# Altium PCB MB2146-07-E.PcbDoc
Units mil, origin at the board's own origin, x right, y up, seen from the top; angles counter-clockwise.
Board outline 3474.57 x 2017.87 mil, 4 copper layers (TOP, POWER, GND, BOTTOM), stack 28.8 mil thick; 122 components, 77 nets, 373 pads, 111 vias.
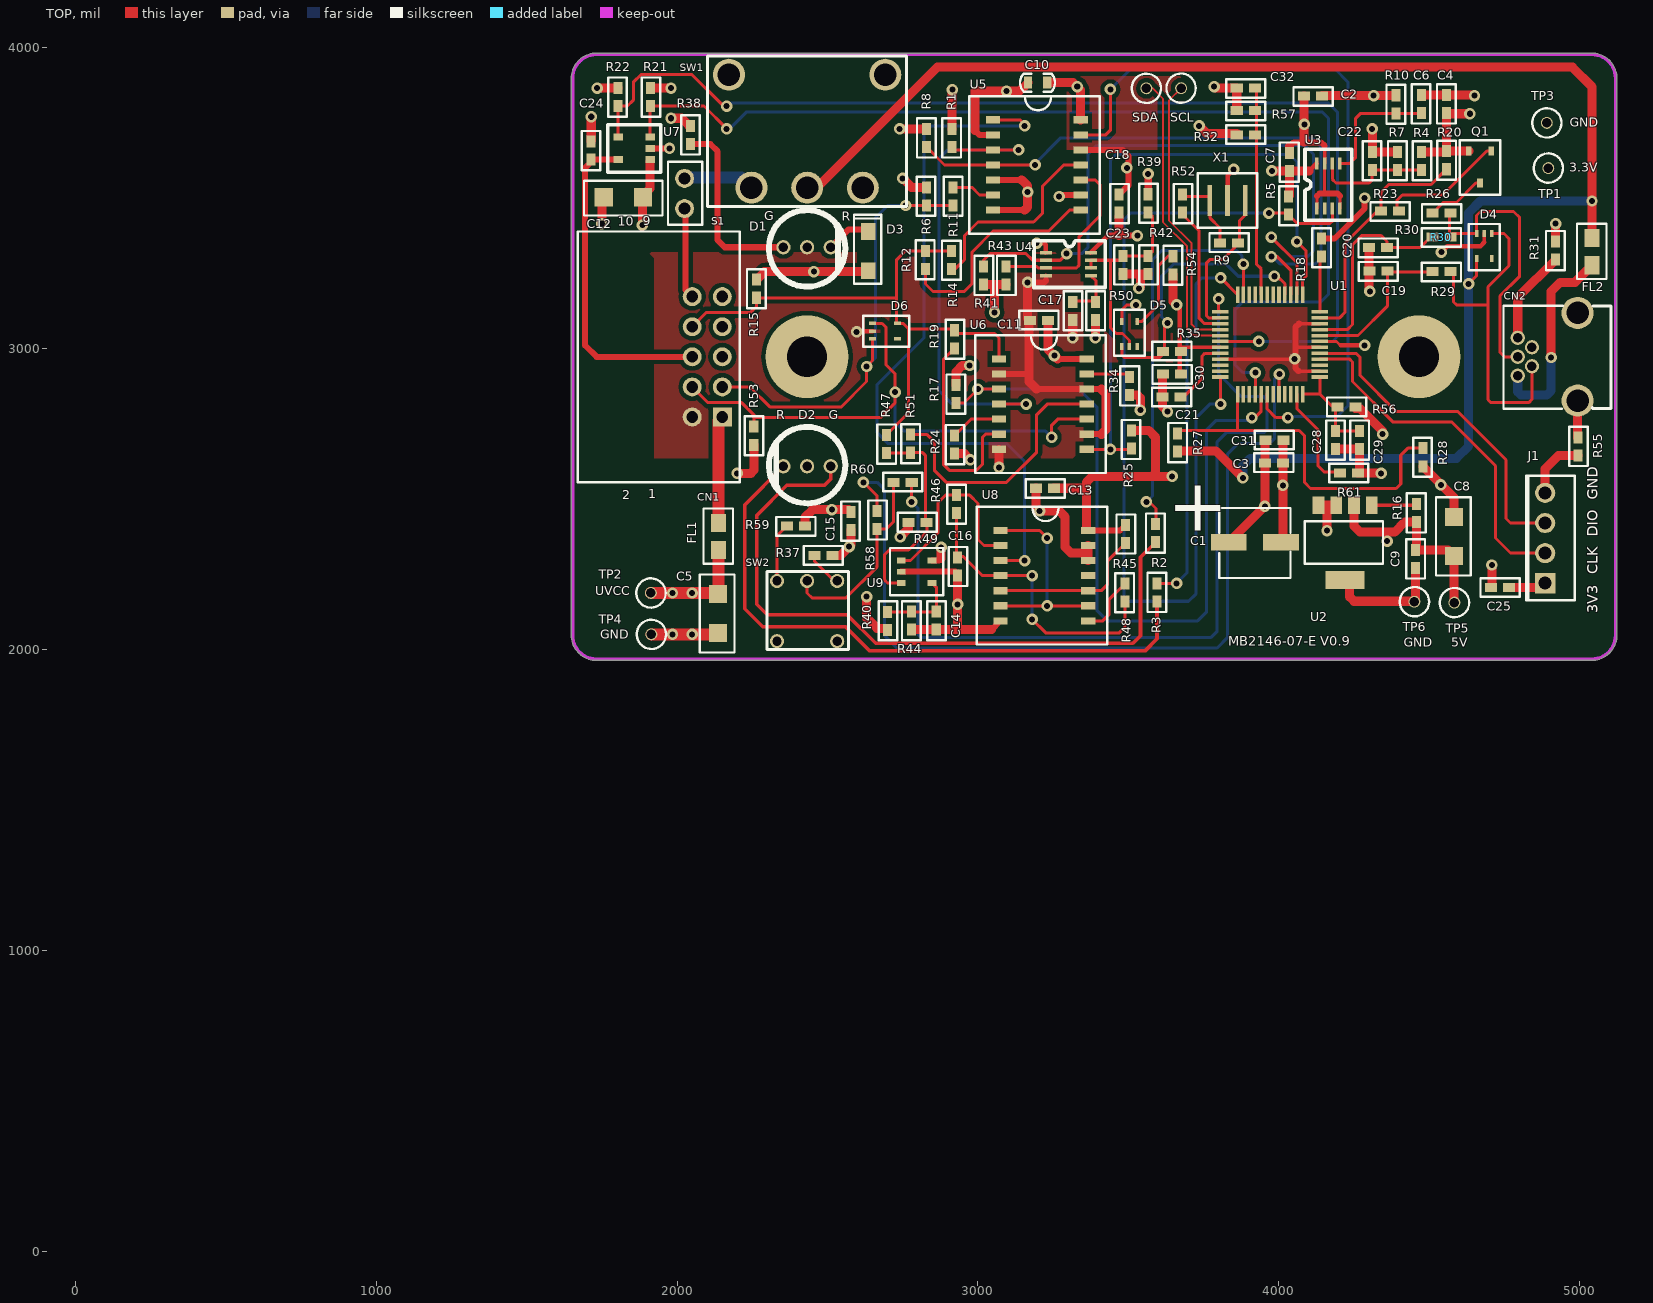
[diagram p0: TOP view]
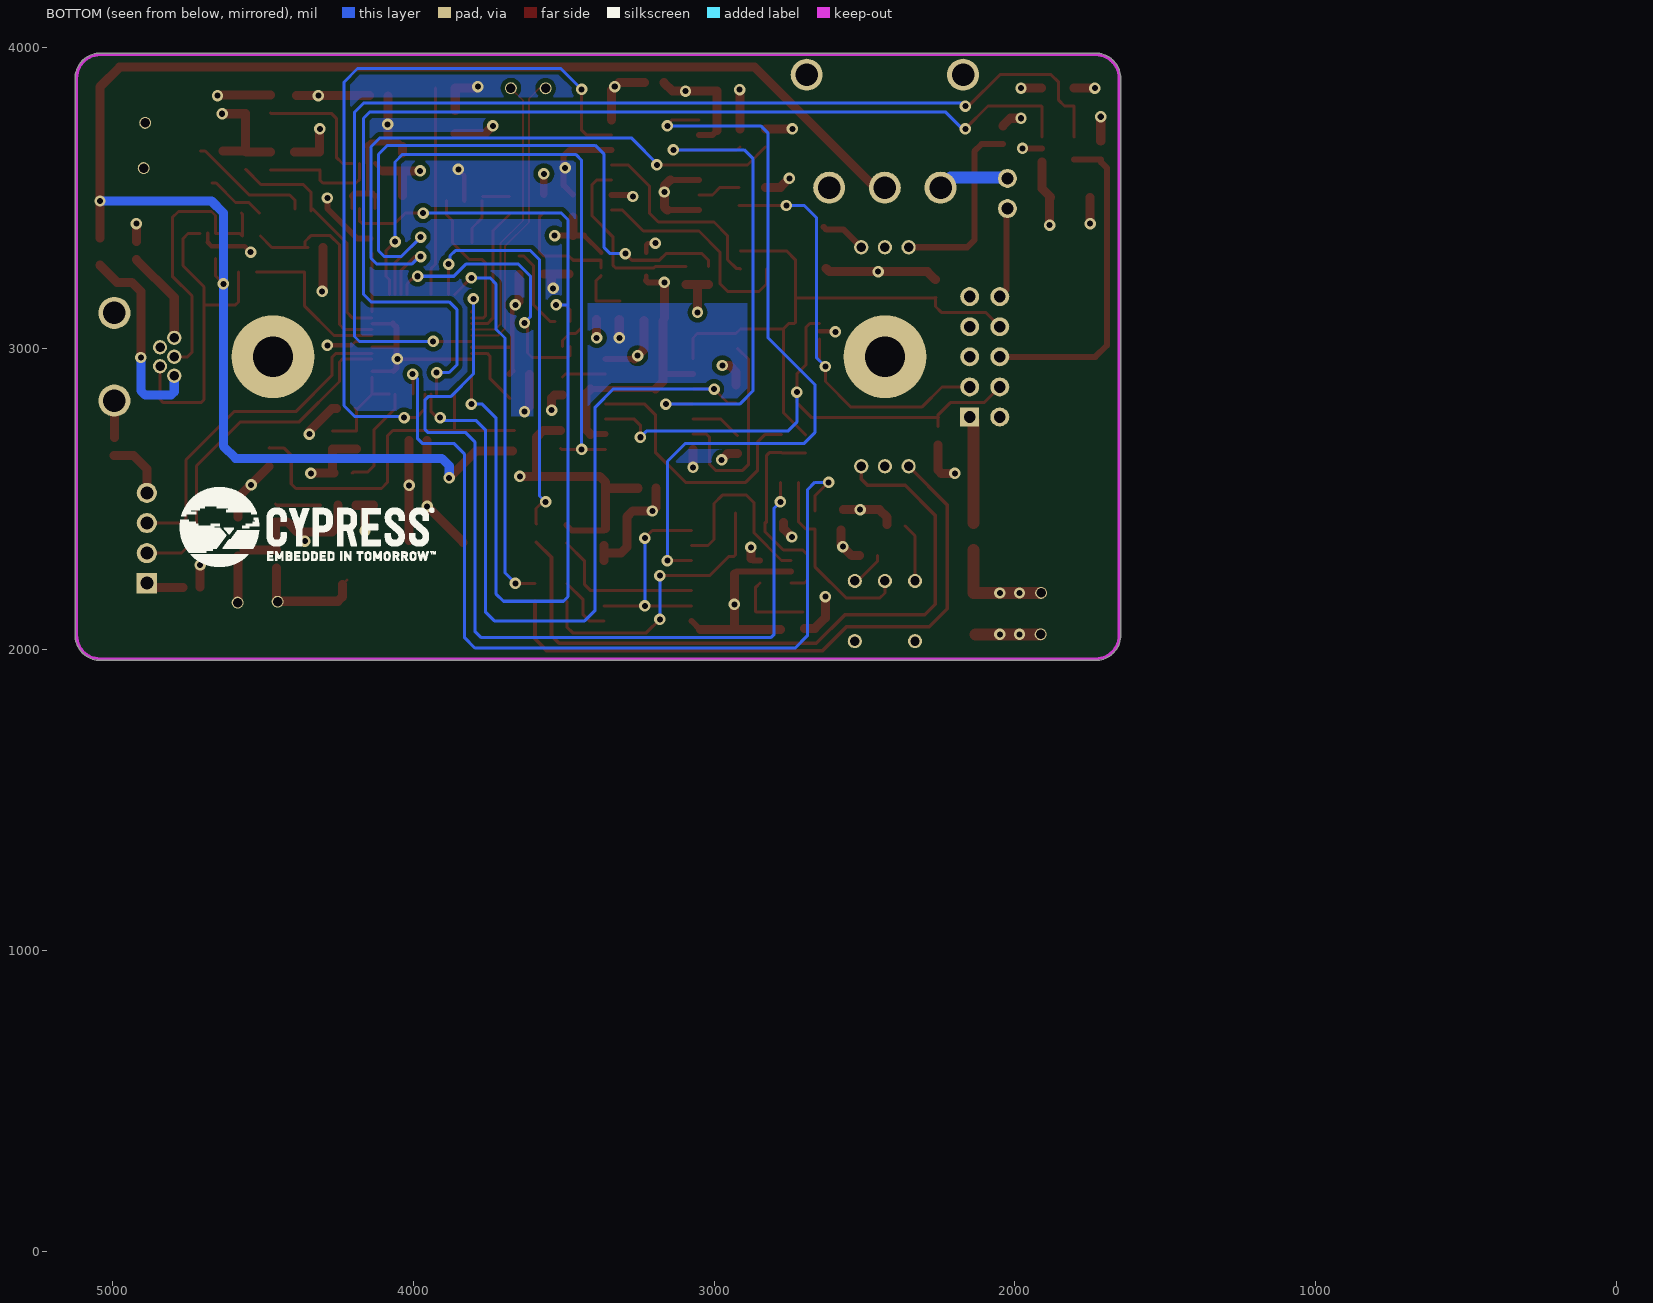
[diagram p1: BOTTOM view, seen from below]
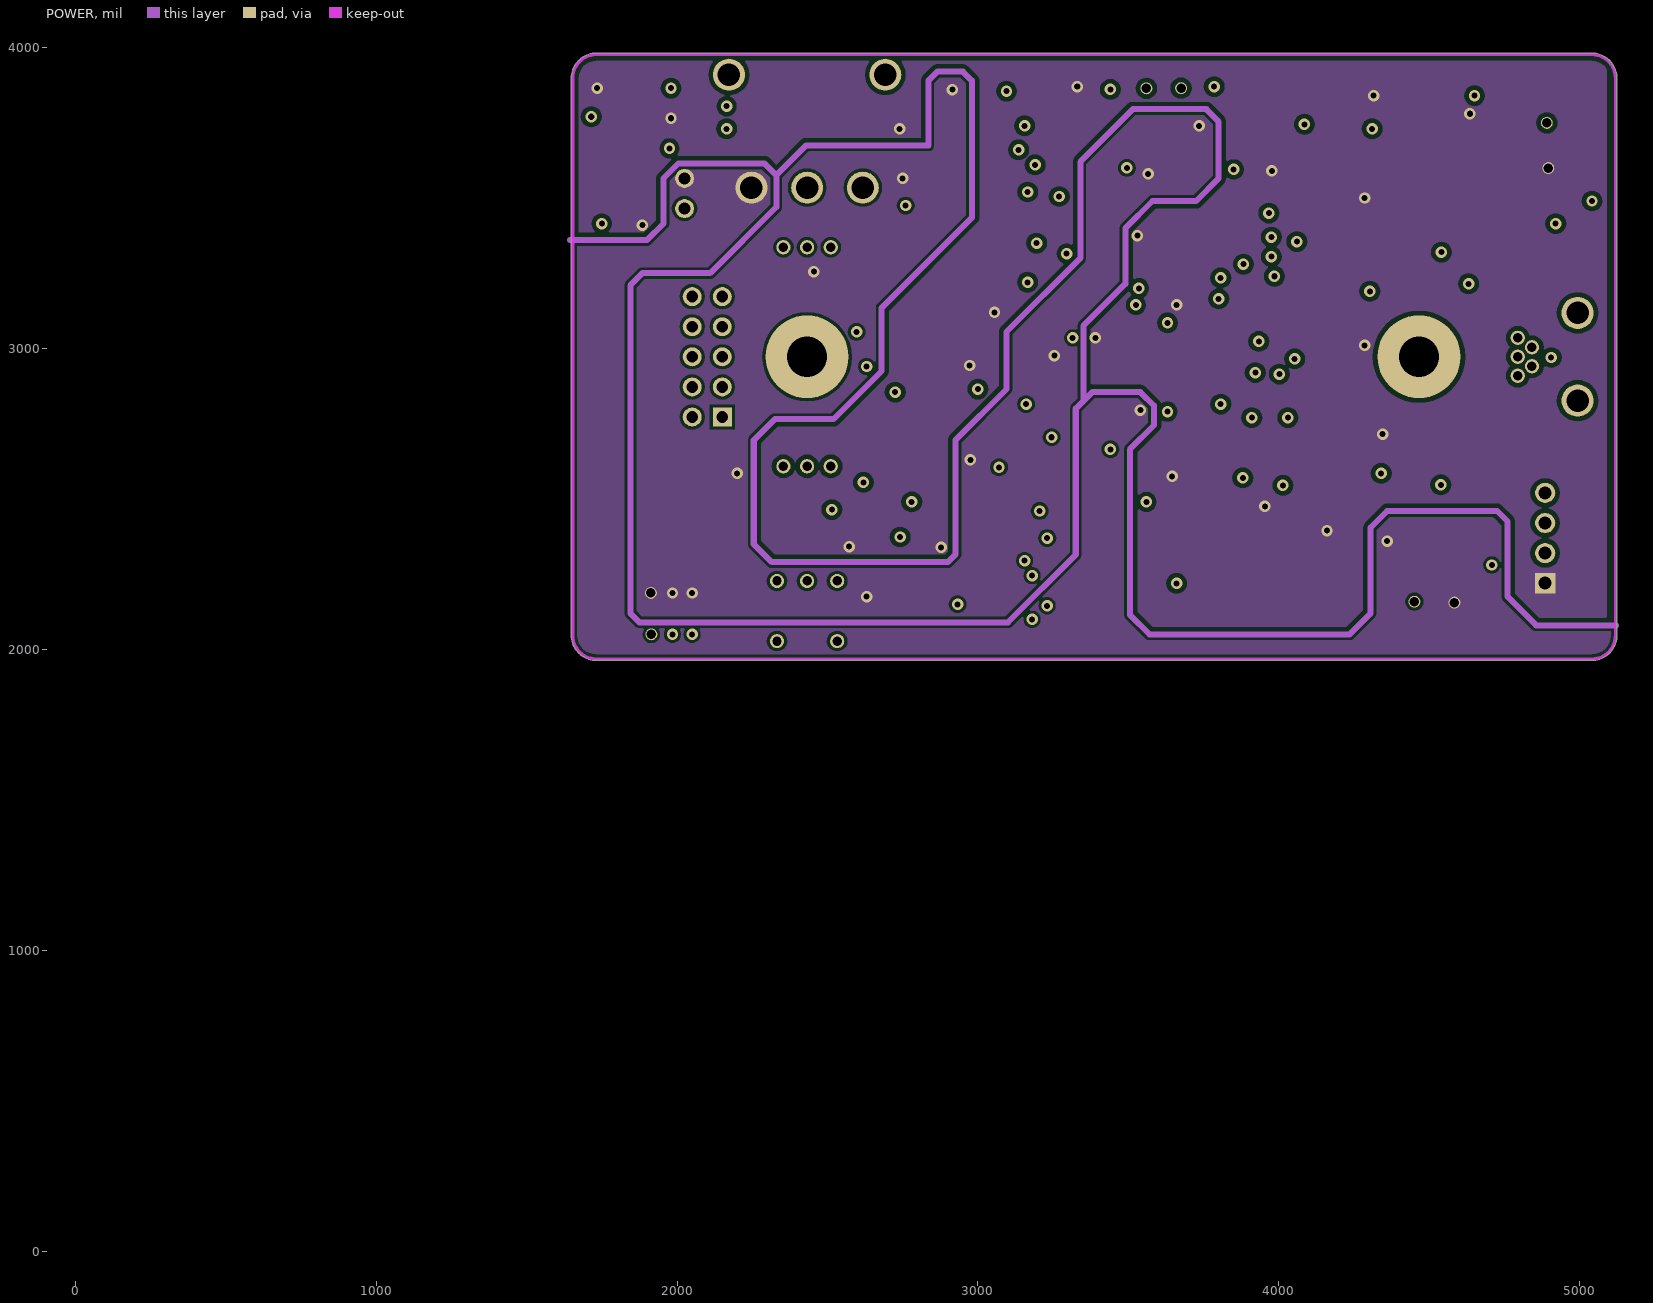
[diagram p2: POWER]
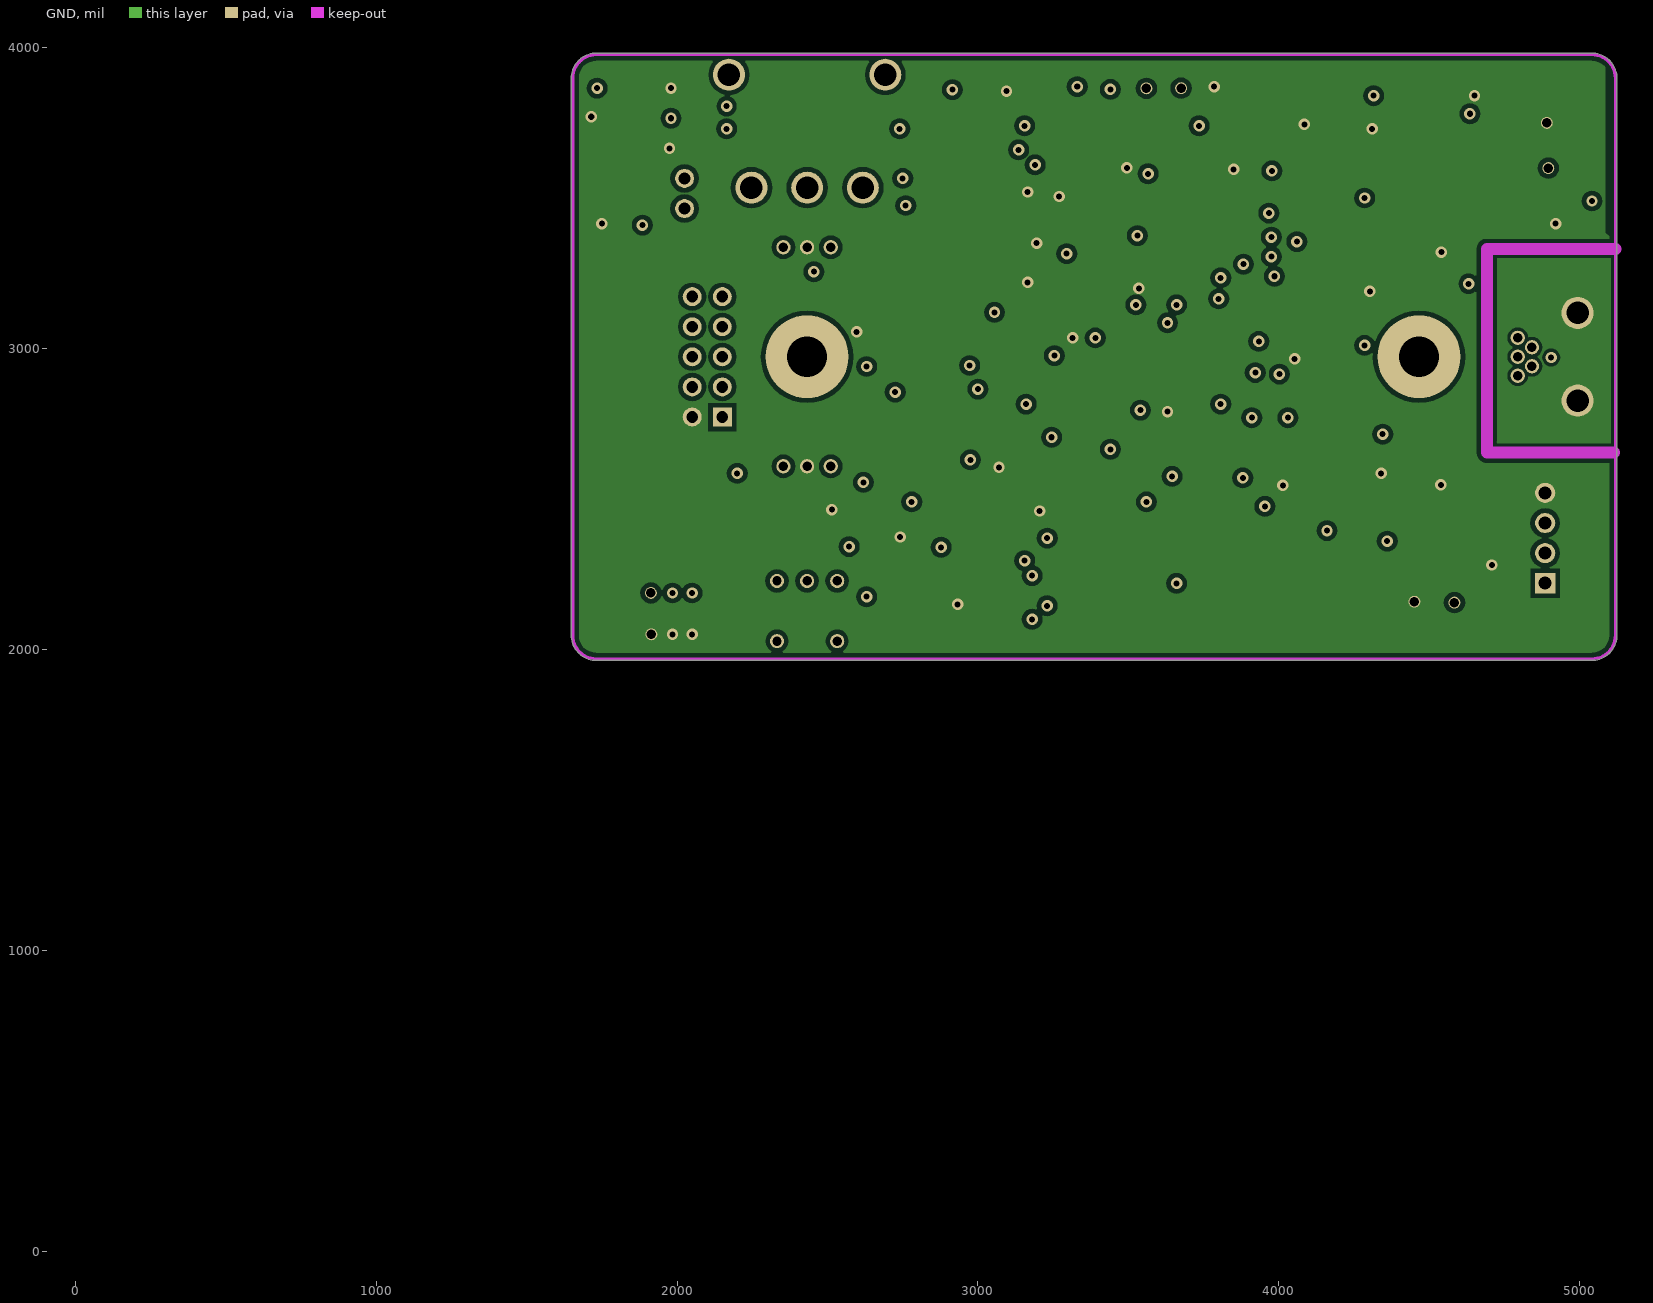
[diagram p3: GND]

## Layer stack, top to bottom
TOP: signal copper 1.2
Dielectric: core 8, FR-4, Dk 4.5
POWER: signal copper 1.2
Dielectric: core 8, FR-4, Dk 4.5
GND: signal copper 1.2
Dielectric: core 8, FR-4, Dk 4.5
BOTTOM: signal copper 1.2

## Board outline
1648.54,2047.24 ccw(c1732.28,2047.24) 1732.28,1963.5 5039.37,1963.5 ccw(c5039.37,2047.24) 5123.11,2047.24 5123.11,3897.63 ccw(c5039.37,3897.63) 5039.37,3981.37 1732.28,3981.37 ccw(c1732.28,3897.63) 1648.54,3897.63

## Design rules (kind name [scope] priority, off if disabled: settings)
Clearance [All] p1: gap=3
HoleSize [All] p1: absolutevalues=TRUE maxlimit=300 minlimit=1 maxpercent=80.000 minpercent=20.000
HoleToHoleClearance [All] p1: gap=3 allowstackedmicrovias=TRUE
MinimumSolderMaskSliver [All] p1: minsoldermaskwidth=0
PlaneConnect [All] p1: planeconnectstyle=Direct reliefexpansion=20 reliefentries=4 reliefconductorwidth=10 reliefairgap=10
PolygonConnect [All] p1: connectstyle=Direct reliefconductorwidth=10 reliefentries=4 polygonreliefangle="90 Angle"
RoutingVias [All] p1: holewidth=28 width=50 viastyle="Through Hole" minholewidth=28 minwidth=50 maxholewidth=28 maxwidth=50
SilkToSilkClearance [All] p1: silktosilkclearance=0
SilkscreenOverComponentPads SilkToSolderMaskClearance [IsPad] p1: minsilkscreentomaskgap=0
SolderMaskExpansion [All] p1: expansion=4
TestPointUsage FabricationTestPointUsage [All] p1: valid=0 allowmultiple=FALSE
Testpoint FabricationTestpoint [All] p1: side=3 testpointundercomponent=TRUE minsize=40 maxsize=100 preferedsize=60 minholesize=0 maxholesize=40 preferedholesize=32 testpointgrid=1 style=297 order=0-112345678
Width [All] p1: maxlimit=50 minlimit=4 preferedwidth=10
18 further rules are at their usual default settings.

## Components (designator, comment, footprint, x,y, rotation, side; value= is the part's Value field where it differs from the comment)
C1 "Cap Pol3" EMVS_E46 3920.5,2355.5 r270 top
C2 "Cap" 0603 4113.5,3838.5 r0 top
C3 "Cap" 0603 3983.5,2619.5 r180 top
C4 "Cap" 0603 4557.5,3812.5 r270 top
C5 "Cap" 1206 2135.5,2119.5 r270 top
C6 "Cap" 0603 4473.5,3812.5 r270 top
C7 "Cap" 0603 4035.5,3619.5 r270 top
C8 "Cap" 1206 4582.5,2375.5 r270 top
C9 "Cap" 0603 4453.5,2300.5 r90 top
C10 "Cap" C0603 3229.5,3883.5 r180 top
C11 "Cap" 0603 3202.5,3093.5 r180 top
C12 "Cap" 1206 1821.5,3502.5 r0 top
C13 "Cap" 0603 3223.5,2535.5 r0 top
C14 "Cap" 0603 2861.5,2095.5 r90 top
C15 "Cap" 0603 2577.5,2426.5 r270 top
C16 "Cap" 0603 2932.5,2275.5 r90 top
C17 "Cap" 0603 3315,3125 r90 top
C18 "Cap" 0603 3469.5,3481.5 r90 top
C19 "Cap" 0603 4330.5,3257.5 r0 top
C20 "Cap" 0603 4329.5,3335.5 r0 top
C21 "Cap" 0603 3643.5,2839.5 r0 top
C22 "Cap" 0603 4310.5,3623.5 r270 top
C23 "Cap" 0603 3482.5,3277.5 r90 top
C24 "Cap" 0603 1713.5,3657.5 r90 top
C25 "0.1uF" 0603 4735,2205 r180 top
C28 "Cap" 0603 4187.5,2695.5 r90 top
C29 "Cap" 0603 4267.5,2695.5 r90 top
C30 "Cap" 0603 3645,2915 r0 top
C31 "Cap" 0603 3985,2695 r180 top
C32 "Cap" 0603 3890,3865 r0 top
CN1 "Header 10H" FAP-10-08 2050.5,3172.25 r270 top
CN2 "VUSB" USB_CN01 4793.78,3035.42 r180 top
D1 "GL3ED8" GL3ED8 2510.98,3336.37 r180 top
D2 "GL3ED8" GL3ED8 2353.5,2608.5 r0 top
D3 "S-183T" S_183T 2635.5,3337.5 r180 top
D4 "NNCD6.2LH" NNCD6_2LH 4682.5,3354.5 r180 top
D5 "NNCD6.2LH" NNCD6_2LH 3503.5,3034.5 r0 top
D6 "NNCD6.2LH" NNCD6_2LH 2677.5,3057.5 r270 top
FL1 "BLM21PG600SN1" 0805 2138.5,2375.5 r90 top
FL2 "BLM21PG600SN1" 0805 5040.5,3321.5 r90 top
J1 "J1" SWD_4_2.54 4880,2370 r90 top
Q1 "RTR030P02" TSMT3_0 4668.5,3620.5 r180 top
R1 "Res1" 0603 2913.5,3699.5 r270 top
R2 "Res1" 0603 3590.5,2386.5 r270 top
R3 "Res1" 0603 3595.5,2189.5 r270 top
R4 "Res1" 0603 4474.5,3623.5 r90 top
R5 "Res1" 0603 4031.5,3474.5 r90 top
R6 "Res1" 0603 2828.5,3505.5 r270 top
R7 "Res1" 0603 4394.5,3623.5 r270 top
R8 "Res1" 0603 2829.5,3699.5 r270 top
R9 "Res1" 0603 3834.5,3350.5 r180 top
R10 "Res1" 0603 4389.5,3811.5 r270 top
R11 "Res1" 0603 2916.5,3505.5 r90 top
R12 "Res1" 0603 2825.5,3294.5 r270 top
R14 "Res1" 0603 2912.5,3293.5 r270 top
R15 "Res1" 0603 2264.5,3198.5 r270 top
R16 "Res1" 0603 4457.5,2453.5 r270 top
R17 "Res1" 0603 2927.5,2848.5 r270 top
R18 "Res1" 0603 4141.01,3335 r90 top
R19 "Res1" 0603 2922.5,3030.5 r90 top
R20 "Res1" 0603 4556.5,3625.5 r90 top
R21 "Res1" 0603 1912.5,3835.5 r90 top
R22 "Res1" 0603 1803.5,3835.5 r270 top
R23 "Res1" 0603 4369.5,3456.5 r0 top
R24 "Res1" 0603 2922.5,2680.5 r90 top
R25 "Res1" 0603 3509.5,2697.5 r270 top
R26 "Res1" 0603 4540.5,3449.5 r0 top
R27 "Res1" 0603 3662.5,2687.5 r90 top
R28 "Res1" 0603 4478.5,2638.5 r270 top
R29 "Res1" 0603 4540,3255 r0 top
R30 "Res1" 0603 4540,3370 r0 top
R31 "Res1" 0603 4919.5,3325.5 r270 top
R32 "Res1" 0603 3890,3710 r180 top
R34 "Res1" 0603 3503.5,2875.5 r90 top
R35 "Res1" 0603 3644.5,2990.5 r180 top
R37 "Res1" 0603 2486.18,2311.67 r180 top
R38 "Res1" 0603 2045.5,3709.5 r270 top
R39 "Res1" 0603 3565.5,3482.5 r90 top
R40 "Res1" 0603 2700,2095 r90 top
R41 "Res1" 0603 3018.5,3242.5 r90 top
R42 "Res1" 0603 3565.5,3277.5 r90 top
R43 "Res1" 0603 3093.5,3242.5 r90 top
R44 "Res1" 0603 2779.5,2095.5 r270 top
R45 "Res1" 0603 3490.5,2383.5 r90 top
R46 "Res1" 0603 2928.5,2482.5 r90 top
R47 "Res1" 0603 2695.5,2682.5 r90 top
R48 "Res1" 0603 3488.5,2188.5 r270 top
R49 "Res1" 0603 2798.5,2421.5 r180 top
R50 "Res1" 0603 3390,3125 r90 top
R51 "Res1" 0603 2775.5,2683.5 r90 top
R52 "Res1" 0603 3680.5,3481.5 r90 top
R53 "Res1" 0603 2255,2710 r90 top
R54 "Res1" 0603 3648.5,3276.5 r270 top
R55 "Res1" 0603 4994.5,2674.5 r90 top
R56 "Res1" 0603 4225,2805 r180 top
R57 "Res1" 0603 3890,3790 r0 top
R58 "Res1" 0603 2665,2430 r90 top
R59 "Res1" 0603 2395,2410 r0 top
R60 "Res1" 0603 2750,2555 r180 top
R61 "Res1" 0603 4232.5,2585.5 r180 top
S1 "NC" FFC_2 2025,3565 r270 top
SCL "SCL" TP_8G 3675,3865 r0 top (schematic designator FP2)
SDA "SDA" TP_8G 3559.75,3864.44 r0 top (schematic designator FP3)
SW1 "5MS1S102AM6QES" 5MS1S102AM6QES 2432.5,3534.5 r180 top
SW2 "8US8R2A1M6RE" M6RE 2432.24,2227.5 r0 top
TP1 "3.3V" TP_8G 4895.5,3599.5 r0 top
TP2 "UVCC" TP_8G 1913.5,2187.5 r0 top
TP3 "GND" TP_8G 4890.5,3749.5 r0 top
TP4 "GND" TP_8G 1915,2050 r0 top
TP5 "5.0V" TP_8G 4583.5,2155.5 r0 top
TP6 "GND" TP_8G 4450.5,2158.5 r0 top
U1 "S6E1C32C0AGV20000" LQFP48 4079.14,3178.79 r180 top
U2 "LP3964EMP-3.3" SOT223_5 4220,2355 r180 top
U3 "RNA52A10MMEL" SOP8 4205,3505 r0 top
U4 "RNA52A10MMEL" SOP8 3265,3240 r270 top
U5 "RD74LVC125BPFEL" SOP14 3050,3760 r270 top
U6 "RD74LVC125BPFEL" SOP14 3070,2965 r270 top
U7 "MAX4789EUK+" SOT23_5L 1840,3665 r270 top
U8 "RD74LVC00BFPEL" SOP14 3075,2395 r270 top
U9 "LMV7219M5" SOT23_5 2810,2270 r90 top
X1 "CSTCR8M00G53-R0" CSTCR 3888.5,3491.5 r0 top
? "Comment" logo 4380.37,2387.99 r180 bottom

## Footprints (in the part's own frame and the unit in brackets; to place one, negate y for a bottom-side part, rotate by r counter-clockwise, add the part's x,y. Pads: shape width x height; smd on the part's side, far side on the other; paste and mask are expansions set on the pad)
5MS1S102AM6QES [mm] "5MS1S102AM6QES"
  round 2.7 hole 1.9: 1(4.7,0) 2(0,0) 3(-4.7,0) 4(-6.6,-9.53) 5(6.6,-9.53)
  silkscreen extent -8.4,-11.1 8.4,1.6, body extent -7.9,-10.8 8.1,1.2, height 3.81
0603 [mil] "0603"
  rect 40x30 smd: 1(-30,0) 2(30,0)
  silkscreen extent -65,-32 65,30, body extent -55,-23 56,21, height 150
0805 [mil] "0805"
  rect 60x50 smd: 1(-45,0) 2(45,0)
  silkscreen extent -91,-48 93,50, body extent -80,-30 80,30, height 150
1206 [mil] "1206"
  rect 60x60 smd: 1(-65,0) 2(65,0)
  silkscreen extent -130,-60 130,55, body extent -110,-40 105,40, height 150
C0603 [mm]
  rect 0.7x1 smd: 1(-0.025,0) 2(1.6,0)
  silkscreen extent -0.68,-0.76 2.28,0.76
CSTCR [mm] "CSTCR"
  rect 0.399x2.601 smd: 1(0,0) 2(-1.5,0) 3(-3,0)
  silkscreen extent -4,-2.3 1,2.3
EMVS_E46 [mil] "EMVS_E46"
  rect 55.1x118.1 smd: 1(0,-86.61) 2(0,86.61)
  silkscreen extent -114,-118 118,118, body extent -102,-102 102,102, height 150
FAP-10-08 [mm] "FAP-10-08"
  rect 1.6x1.6 hole 1: 1(10.16,2.54)
  round 1.6 hole 1: 2(10.16,0) 3(7.62,2.54) 4(7.62,0) 5(5.08,2.54) 6(5.08,0) 7(2.54,2.54) 8(2.54,0) 9(0,2.54) 10(0,0)
  silkscreen extent -5.5,-9.66 15.66,4, body extent -5.1,-9.4 15.4,3.8, height 3.81
FFC_2 [mm] "FFC_2"
  round 1.6 hole 1: 1(0,0) 2(2.54,0)
  silkscreen extent -1.4,-1.4 3.9,1.5, body extent -1,-0.9 3.5,0.8, height 3.81
GL3ED8 [mil] "GL3ED8"
  round 47.2 hole 31.5: 1(0,0) 2(78.74,0) 3(157.48,0)
  silkscreen extent -48,-123 206,131, body extent -58,-133 216,141, height 150
logo [mil]
  silkscreen extent -395,-114 456,150
LQFP48 [mm] "LQFP48"
  rect 0.3x1.4 smd: 1(0,0) 2(0.5,0) 3(1,0) 4(1.5,0) 5(2,0) 6(2.5,0) 7(3,0) 8(3.5,0) 9(4,0) 10(4.5,0) 11(5,0) 12(5.5,0) 25(5.5,8.4) 26(5,8.4) 27(4.5,8.4) 28(4,8.4) 29(3.5,8.4) 30(3,8.4) 31(2.5,8.4) 32(2,8.4) 33(1.5,8.4) 34(1,8.4) 35(0.5,8.4) 36(0,8.4)
  rect 1.4x0.3 smd: 13(6.95,1.45) 14(6.95,1.95) 15(6.95,2.45) 16(6.95,2.95) 17(6.95,3.45) 18(6.95,3.95) 19(6.95,4.45) 20(6.95,4.95) 21(6.95,5.45) 22(6.95,5.95) 23(6.95,6.45) 24(6.95,6.95) 37(-1.45,6.95) 38(-1.45,6.45) 39(-1.45,5.95) 40(-1.45,5.45) 41(-1.45,4.95) 42(-1.45,4.45) 43(-1.45,3.95) 44(-1.45,3.45) 45(-1.45,2.95) 46(-1.45,2.45) 47(-1.45,1.95) 48(-1.45,1.45)
  body extent -2.3,-0.9 7.8,9.3, height 3.81
M6RE [mil] "M6RE"
  round 47.2 hole 31.5: 1(-100,0) 2(0,0) 3(100,0) 4(100,-200) 5(-100,-200)
  silkscreen extent -134,-228 138,32
NNCD6_2LH [mm] "NNCD6_2LH"
  rect 0.3x0.599 smd: 1(-0.65,-0.7) 2(0,-0.7) 3(0.65,-0.7) 4(0.65,1.4) 5(-0.65,1.4)
  silkscreen extent -1.3,-1.5 1.3,2.4, body extent -1,-1.2 1,2, height 3.81
S_183T [mm] "S_183T"
  rect 1.199x1.4 smd: 1(0,-1.3) 2(0,2)
  silkscreen extent -1.1,-2.7 1.2,3.1, body extent -1.2,-2.8 1.3,3.2, height 3.81
SOP8 [mm] "SOP8"
  rect 0.3x1.001 smd: 1(-2,-1) 2(-1.35,-1) 3(-0.7,-1) 4(-0.05,-1) 5(-0.05,2.8) 6(-0.7,2.8) 7(-1.35,2.8) 8(-2,2.8)
  silkscreen extent -3,-2 0.95,4
SOP14 [mil] "SOP14"
  rect 23.6x47.2 smd: 1(0,0) 2(50,0) 3(100,0) 4(150,0) 5(200,0) 6(250,0) 7(300,0) 8(300,291.34) 9(250,291.34) 10(200,291.34) 11(150,291.34) 12(100,291.34) 13(50,291.34) 14(0,291.34)
  silkscreen extent -79,-79 379,354, body extent -35,-43 343,331, height 150
SOT23_5 [mil] "SOT23_5"
  rect 18.7x29.5 smd: 1(25.59,64.96) 2(-11.81,64.96) 3(-49.21,64.96) 4(-49.21,-37.4) 5(25.59,-37.4)
  silkscreen extent -91,-75 67,102, body extent -71,-59 47,91, height 150
SOT23_5L [mil] "SOT23_5L"
  rect 23.6x31.5 smd: 1(37.4,70.87) 2(0,70.87) 3(-37.4,70.87) 4(-37.4,-35.43) 5(37.4,-35.43)
  silkscreen extent -79,-71 79,106, body extent -59,-59 59,94, height 150
SOT223_5 [mm] "SOT223_5"
  rect 1x1.5 smd: 1(-2.25,-3.15) 2(-0.75,-3.15) 3(0.75,-3.15) 4(2.25,-3.15)
  rect 3.299x1.501 smd: 5(0,3.15)
  silkscreen extent -3.2,-1.8 3.4,1.8, body extent -3.6,-4.3 3.7,4.4, height 3.81
SWD_4_2.54 [mm]
  rect 1.7x1.7 hole 1.1: 1(-3.81,-0.127)
  round 1.7 hole 1.1: 2(-1.27,-0.127) 3(1.27,-0.127) 4(3.81,-0.127)
  silkscreen extent -5.25,-2.63 5.25,1.58
TP_8G [mil] "TP_8G"
  round 39.4 hole 31.5: 1(0,0)
  silkscreen extent -49,-49 49,49
TSMT3_0 [mil] "TSMT3_0"
  rect 18.7x29.5 smd: 1(-37.4,-35.43) 2(37.4,-35.43) 3(0,70.87)
  silkscreen extent -67,-71 67,110, body extent -51,-55 51,94, height 150
USB_CN01 [mil] "USB_CN01"
  round 47.2 hole 31.5: 1(0,125.98) 2(-47.24,94.49) 3(0,62.99) 4(-47.24,31.5) 5(0,0)
  round 106.3 hole 74.8: SHELL1(-198.82,208.66) SHELL2(-198.82,-82.68)
  silkscreen extent -310,-106 47,236, body extent -280,-90 30,220, height 150

## Part data
C25: library part "C_no pol", "Capacitor without polarity"
C28 C29 C30 C31 C32: "Capacitor"
J1: library part "Header 4", "Header, 4-Pin"
R18 R32 R56 R57 R58 R59 R60 R61: "Resistor"
SCL SDA: library part TP

## Free pads (board coordinates)
  round 275.59 hole 133.86: 1(2432.24,2972.44) 1(4465.59,2972.44)

## Via types
v1: diameter 38, hole 20, TOP to BOTTOM, 111 vias

## Nets (pads, with @x,y where several pads share a name; then routed paths per layer and width w, separated by ;. In a path a pad name is that pad's centre, name@x,y a point inside that pad or via, vN(x,y) a via of type N, cw(c..) or ccw(c..) an arc to the next point about the centre after c; other vN are vias at no path point)
3.3V: C1.1 C2.2 C3.2 C4.2 C7.2 C10.1 C12.2 C13.2 C15.2 C18.1 C25.1 C30.2 C31.2 J1.1 Q1.2 R4.2 R5.2 R8.1 R10.1 R17.1 R18.2 R20.2 R22.1 R25.1 R35.1 R37.1 R38.1 R41.1 R43.1 R45.2 R50.1 R54.2 R56.1 TP1.1 U1.19 U1.43 U2.3 U2.4 U3.8 U4.8 U5.14 U7.1 U8.14 U9.5 | length 4849.7
  TOP w10: v1(1734.44,3865) v1@1734.94,3865.5 ; C12.2@1881.5,3502.5 C12.2@1885,3499 ; R8.1@2829,3730 R8.1 ; U8.14@3360,2401.34 U8.14 ; R50.1@3390,3097 R50.1@3391.5,3098.5 ; C31.2@3953.5,2693.5 C31.2 ; R5.2 R5.2@4035.5,3508.5 ; C7.2@4035,3590 C7.2 ; U1.43 4191.72,3023.28 4205,3010 ; C2.2 C2.2@4145,3840 ; v1(4345,2715) v1@4345,2725 ; R10.1@4388,3840 R10.1 ; R20.2@4554.5,3653.5 R20.2 R20.2@4556.93,3655.93 ; C4.2@4556.5,3781.5 C4.2 C4.2@4560,3780
  TOP w12: R35.1@3670,3003.59 U1.19
  TOP w15: U4.8 3431.5,3375 ; v1@3648.5,3156.5 v1(3660,3145) 3670,3135 C30.2@3670,2925 ; 4100.52,3589.5 U3.8 ; 4205,3010 v1(4285,3010)
  TOP w20: U9.5 2847.99,2295 2870,2295 ; U8.14 3472,2395 R45.2 ; 3431.5,3375 3480,3375 v1(3530,3375) ; C30.2@3670,2925 C30.2@3680,2915 ; R18.2 4185,3365 4285,3465 v1(4285,3500)
  TOP w30: v1@1734.94,3865.5 R22.1 ; C12.2@1881.5,3502.5 1910.87,3531.87 U7.1@1910.87,3620 ; v1(1885,3410) C12.2@1885,3499 ; v1(1980,3765) 2015,3765 R38.1@2040.5,3739.5 ; R37.1 2541.67,2311.67 2565,2335 2577.5,2347.5 C15.2 ; v1(2740,3730) R8.1@2829,3730 ; 2877.6,2302.6 v1(2877.6,2339.41) ; R17.1 2927.5,2922.5 2948.5,2943.5 v1(2972.5,2943.5) ; R41.1 3055,3212.5 ; v1(3055,3120) 3055,3212.5 ; R43.1 3055,3212.5 ; C10.1 3316.5,3883.5 3341.34,3858.66 U5.14 ; C13.2 3360,2535.5 ; U8.14@3360,2401.34 3360,2535.5 ; v1(3390,3035) R50.1@3390,3097 ; 3469.5,3375 C18.1@3469.5,3436.5 ; R25.1 3567.5,2727.5 3590,2705 3590,2585 3580,2575 ; v1(3645,2575) 3580,2575 ; v1@3648.5,3156.5 R54.2 ; C1.1 v1(3953.5,2475.11) C3.2 C31.2@3953.5,2693.5 ; v1@3975,3590 C7.2@4035,3590 ; R5.2@4035.5,3508.5 C7.2 4100.52,3589.5 ; U2.4 4160,2479.02 ; C2.2@4145,3840 v1(4315,3840) R10.1@4388,3840 ; v1(4160,2395) 4160,2479.02 ; U2.3 4160,2479.02 ; R56.1@4255,2800 4270,2800 v1@4345,2725 ; R4.2 R20.2@4554.5,3653.5 ; R20.2 4556.5,3725 C4.2@4556.5,3781.5 ; R20.2@4556.93,3655.93 Q1.2 ; C4.2@4560,3780 v1(4635,3780) ; C25.1 4870,2205 J1.1 ; 3360,2535.5 3360,2555 3380,2575 3580,2575
  other v1: 2571.79,2341.79 3976.66,3590 3330,3870
5.0V: C8.2 C9.2 R16.2 R34.1 S1.1 SW1.1 TP5.1 U2.2 | length 997.2
  TOP w10: C9.2 C9.2@4457.5,2334.5 ; C8.2@4562.5,2330.5 C8.2 ; TP5.1@4582.5,2166.5 TP5.1@4588.5,2160.5
  TOP w30: R34.1 3529.5,2845.5 3540,2835 v1(3540,2795) ; U2.2 4249.53,2410.47 4270,2390 4385,2390 4418.5,2423.5 R16.2 C9.2@4457.5,2334.5 ; C9.2 C8.2@4562.5,2330.5 ; TP5.1@4582.5,2166.5 C8.2
  BOTTOM w40: S1.1@2028.5,3568.5 2213.46,3568.5 SW1.1
  other v1: 4360,2360
CCM_SELECT: R27.2 R28.1 U1.25 | length 1220.7
  TOP w10: R27.2@3662.5,2727.5 3837.5,2727.5 4067.5,2727.5 4085,2710 4085,2555 4105,2535 4390,2535 4405,2550 4405,2645 4428.5,2668.5 R28.1 R28.1@4476.66,2670.34 ; 3862.6,2727.5 U1.25
"ECO IN": R52.1 U1.15 | length 445.6
  TOP w10: R52.1@3680,3445 3735,3390 3735,3100 3752.67,3082.33 U1.15
"ECO OUT": R9.1 U1.14 X1.1 | length 509.9
  TOP w10: U1.14 3765.97,3102.02 3760,3107.98 3760,3285 3770,3295 3813,3295 3868.5,3350.5 3868.5,3423.5 3888.5,3443.5 X1.1
FGND: CN2.SHELL1 CN2.SHELL2 R55.2 | length 122.3
  TOP w30: R55.2@4992.6,2704.5 CN2.SHELL1
GND: C1.2 C2.1 C3.1 C4.1 C5.2 C6.1 C7.1 C8.1 C9.1 C10.2 C11.2 C12.1 C13.1 C14.1 C15.1 C16.1 C17.1 C18.2 C19.1 C20.1 C21.1 C22.1 C23.1 C24.2 C25.2 C28.1 C29.1 C30.1 C31.1 C32.1 CN1.2 D1.2 D2.2 D4.2 D6.2 J1.4 R7.1 R21.2 R28.2 R31.1 R42.1 R44.2 R49.2 R55.1 R57.1 R59.2 R61.1 TP3.1 TP4.1 TP6.1 U1.21 U1.38 U1.42 U1.46 U2.5 U3.1 U3.4 U3.7 U4.1 U4.4 U5.2 U5.5 U5.7 U5.9 U5.12 U6.2 U6.7 U6.9 U6.12 U7.2 U8.7 U8.12 U8.13 U9.2 X1.2 | length 8175.3
  TOP w10: C24.2 C24.2@1715,3689 ; C12.1@1750,3501 C12.1@1751.5,3502.5 ; TP4.1 TP4.1@1919.5,2054.5 ; v1@1979.5,3865.5 v1(1980,3865) ; C5.2@2125,2065 C5.2 C5.2@2131,2050 ; C15.1@2569.54,2464.46 C15.1 ; v1(2596.66,3055) v1@2599.16,3057.5 ; C16.1@2924.81,2258.19 C16.1@2932.5,2250.5 ; 2932.5,2068 2935,2065.5 ; C11.2@3165,3101 C11.2 C11.2@3170,3091 ; C17.1@3312.5,3098.5 C17.1@3315,3096 ; C1.2 C1.2@4013.5,2361.89 ; C31.1@4013.5,2693.5 C31.1 ; v1@4054.22,2964.22 v1@4055,2965 ; 4055,3000 4058.59,3003.59 ; 4083.5,3686.5 4085,3685 ; U3.1 4126.26,3506.26 ; 4151.85,3515 U3.7 ; U3.4 4203.03,3506.97 ; U2.5 U2.5@4235,2215.98 ; R61.1 R61.1@4267.5,2590.5 ; v1(4310,3730) v1@4310.5,3729.5 ; v1@4339.5,2585.5 v1(4340,2585) ; TP6.1@4449,2160 TP6.1 TP6.1@4453.5,2161.5 ; v1@4647.5,3842.5 v1(4650,3840) ; C25.2 C25.2@4707.5,2207.5 ; v1@4919.5,3414.5 v1(4920,3415)
  TOP w12: U1.21 v1@4054.22,2964.22 ; 4058.59,3003.59 U1.42 ; 4065.15,2924.85 U1.38@4136.23,2924.85 ; 4067.33,3082.33 U1.46 ; U3.7 4151.85,3673.15 ; 4682.5,3352.5 D4.2
  TOP w15: v1@2599.16,3057.5 D6.2 ; v1(3195,3350) 3220,3350 3225.63,3344.37 U4.1 ; 3225.63,3225.63 U4.4 ; X1.2@3830,3491.5 3830,3575 v1(3850,3595) ; v1(4540,3320) 4560,3340 4670,3340 4682.5,3352.5
  TOP w20: U7.2 v1(1975,3665) ; U9.2 C16.1@2924.81,2258.19 ; 2990,3725 3005,3710 U5.2 ; 3045.5,2065.5 U8.7 ; U5.7 3155,3460 ; U5.5 3145,3560 ; U6.2 3170,2915 ; v1(3165,3220) 3220,3220 3225.63,3225.63 ; 3195,2865 U6.12 3410,2865 ; v1@3270,3510 U5.9 ; U5.12 3480,3660 3500,3640 3500,3542 C18.2 ; U6.9 3410,2715 ; 4035.5,3670.5 4050,3685 4085,3685 4140,3685 4151.85,3673.15 ; 4065.15,2924.85 4055,2935 4055,2965 4055,3000 4055,3070 4067.33,3082.33 ; 4126.26,3506.26 4135,3515 4160,3515 4195,3515 4203.03,3506.97
  TOP w30: C24.2@1715,3689 v1(1715,3770) ; v1(1750,3415) C12.1@1750,3501 ; R21.2 v1@1979.5,3865.5 ; R59.2@2425,2415 2425,2439 2450.46,2464.46 C15.1@2569.54,2464.46 ; v1(2741.5,2373.5) 2768.5,2400.5 R49.2 ; R44.2 C14.1 2935,2065.5 3045.5,2065.5 ; 2932.5,2068 C16.1@2932.5,2250.5 ; 2990,3725 2990,3855 3138.01,3855 C10.2 ; v1(3070,2605) U6.7 ; 3145,3560 3165,3540 3165,3470 3155,3460 ; C11.2@3165,3101 v1(3165,3220) ; C11.2@3170,3091 3170,2915 3170,2890 3195,2865 ; C13.1 3193.5,2471.5 v1(3205,2460) 3270,2460 3290,2440 3290,2340 3310,2320 3366.34,2320 ; v1(3315,3035) C17.1@3315,3096 ; U8.12 U8.13 ; 3410,2715 3425,2730 3425,2850 3410,2865 ; C23.1 3540,3247.5 ; v1(3535,3200) 3540,3205 3540,3247.5 ; R42.1 3540,3247.5 ; C30.1@3613.5,2913.5 3613.5,2806.5 v1(3630,2790) ; v1(3785,3870) 3790,3865 C32.1 R57.1 ; C1.2@4013.5,2361.89 C3.1 C31.1@4013.5,2693.5 ; C7.1 4035.5,3670.5 ; 4083.5,3686.5 C2.1 ; C28.1 C29.1 R61.1@4267.5,2590.5 ; U2.5@4235,2215.98 4235,2175 4250,2160 TP6.1@4449,2160 ; R61.1 v1@4339.5,2585.5 ; v1@4299.5,3190 C20.1 ; v1@4310.5,3729.5 C22.1 R7.1 ; TP6.1@4453.5,2161.5 C9.1 ; C6.1 4515,3842.5 C4.1 v1@4647.5,3842.5 ; R28.2 4582.5,2504.5 C8.1 ; C25.2@4707.5,2207.5 v1(4707.5,2280.5) ; J1.4 4885,2600 4929.5,2644.5 R55.1 ; TP3.1@4890,3750 TP3.1 ; R31.1 v1@4919.5,3414.5
  TOP w40: TP4.1 C5.2@2131,2050
  other v1: 1985,2050 2050,2050 2932.5,2150 2514.5,2464.46 4013.5,2545 4538.05,2546.95 4052.5,2965.5 4302.16,3190 3270,3505 3165,3520 3495,3600 4085,3745 3095,3855
INITX: D5.5 R5.1 U1.24 U3.3 | length 3176.3
  TOP w10: D5.5 3477.91,3127.91 3495,3145 v1(3525,3145) ; v1@3805,2815 3805.52,2815.52 U1.24 ; v1@3970,3450 4026,3450 R5.1 4061,3415 4170,3415 4177.44,3422.44 U3.3
  BOTTOM w10: v1(3525,3145) 3485,3145 ; v1(3806.66,2815) 3770,2815 3725,2770 3725,2185 3700,2160 3500,2160 3485,2175 3485,3145 ; v1(3966.66,3450) 3507.64,3450 3485,3427.36 3485,3145
NetC6_2: C6.2 R10.2 U3.5 | length 416.1
  TOP w10: U3.5 4203.27,3615 4235,3615 4255,3635 4255,3765 4270,3780 4388,3780 R10.2 4472.5,3781.5 C6.2
NetC14_2: C14.2 R40.2 R44.1 U9.4 | length 258.5
  TOP w10: R40.2@2704.5,2124.5 2860.5,2124.5 C14.2 2861.5,2206.69 U9.4
NetC16_2: C16.2 R46.1 R48.2 U8.4 | length 1000.2
  TOP w10: R46.1 2928.5,2314.5 2932.5,2310.5 2935,2308 2952,2308 3015,2245 U8.4 v1(3180,2245) v1@3185,2245 ; v1(3180,2100) 3225,2055 3470,2055 3488.5,2073.5 R48.2
  BOTTOM w10: v1@3175,2090 3180,2095 v1(3180,2245)
NetC17_2: C17.2 R50.2 U4.5 | length 169.2
  TOP w10: C17.2@3312.5,3158.5 3391.5,3158.5 3391.5,3225.71 U4.5
NetC21_2: C21.2 U1.20 | length 232.3
  TOP w10: C21.2@3678.5,2834.5 3745,2901 3745,2975 3753.91,2983.91 U1.20
NetC22_2: C22.2 R4.1 R7.2 U3.6 | length 392.3
  TOP w10: U3.6 4177.44,3562.56 4190,3550 4300,3550 4310,3560 4310,3593 C22.2 R7.2 R4.1
NetC23_2: C23.2 D5.2 R39.1 R42.2 U4.6 U4.7 | length 703.4
  TOP w10: U4.6 U4.7 3440,3293.15 ; D5.2 3503.5,3026.5 3480,3050 3460,3050 3440,3070 3440,3293.15 ; R39.1 3580.5,3437.5 3580.5,3322.5 R42.2 3497.5,3307.5 C23.2 3468.15,3293.15 3440,3293.15
NetC24_1: C24.1 CN1.6 U7.5 | length 1087.4
  TOP w10: C24.1@1713.5,3618.5 C24.1 C24.1@1713.6,3627.6
  TOP w20: C24.1@1713.5,3618.5 1695,3600 1695,3010 1732.75,2972.25 CN1.6 ; C24.1@1713.6,3627.6 U7.5
NetC28_2: C28.2 C29.2 R56.2 U1.36 U1.37 | length 346.3
  TOP w10: U1.36 4136.92,2848.08 ; U1.37 4136.23,2858.77 4136.92,2848.08 ; R56.2@4188.5,2796.5 4136.92,2848.08 ; R56.2@4193.5,2801.5 4187.5,2795.5 C28.2 C29.2
NetCN1_1: CN1.1 FL1.2 | length 356.7
  TOP w20: CN1.1@2138.5,2760.25 CN1.1
  TOP w40: FL1.2 CN1.1@2138.5,2760.25
NetCN1_3: CN1.3 D6.3 R6.2 R11.1 | length 1561.4
  TOP w10: CN1.3 2242.75,2872.25 2310,2805 2545,2805 2630,2890 v1(2630,2940) 2649.94,2959.94 D6.3 ; v1(2760,3475) 2916,3475 R11.1 R6.2
  BOTTOM w10: v1(2630,2940) 2660,2970 2660,3435 2700,3475 v1(2760,3475)
NetCN1_4: CN1.4 D6.1 R53.2 U6.10 | length 1892.3
  TOP w10: CN1.4 2102.75,2820 2215,2820 2256.5,2778.5 R53.2@2256.5,2740 ; 2255,2770 2675,2770 2725,2820 2725,2915 2695,2945 2695,3070 2681.91,3083.09 D6.1 ; v1(3245,2705) 3245,2745 3265,2765 U6.10
  BOTTOM w10: v1(2725,2855) 2725,2755 2755,2725 3225,2725 v1(3245,2705)
NetCN1_8: CN1.8 D6.5 R12.1 R14.1 R15.2 R19.2 R47.2 U6.1 | length 1957.3
  TOP w10: CN1.8 2098.25,3120 2245,3120 2264.5,3139.5 R15.2 ; R15.2@2263,3170 R15.2 ; R47.2 2770,2787 2770,3065 ; 2730,3168.5 R15.2 ; R14.1 2911.5,3324.5 R12.1 2759.5,3324.5 2730,3295 2730,3145 2730,3085.71 D6.5 2751.91,3083.09 2770,3065 ; U6.1 3070,3035 3055.5,3049.5 2927.5,3049.5 2912,3065 2770,3065
NetCN1_10: CN1.10 S1.2 | length 305.4
  TOP w20: S1.2@2028.5,3468.5 2028.5,3194.25 CN1.10
NetCN2_1: CN2.1 FL2.1 | length 676.6
  TOP w30: v1(4905,2970) 4905,3190 4935,3220 4984,3220 FL2.1
  BOTTOM w30: CN2.1 4793.78,2856.22 4805,2845 4890,2845 4905,2860 v1(4905,2970)
NetCN2_2: CN2.2 D4.1 R29.2 | length 1111
  TOP w10: R29.2@4580.5,3254.5 4580.5,3154.5 4590,3145 4695,3145 ; D4.1 4747.94,3382.06 4765,3365 4765,3275 4695,3205 4695,3145 ; CN2.2 4841.02,2831.02 4830,2820 4705,2820 4695,2830 4695,3145
NetCN2_3: CN2.3 D4.3 R26.2 R30.2 | length 926.3
  TOP w10: R26.2 4567.5,3446.5 4567.5,3373.5 4576.06,3382.06 D4.3 4656.91,3441.91 4670,3455 4780,3455 4800,3435 4800,3240 4735,3175 4735,2987.43 4750,2972.43 CN2.3
NetCN2_5: CN2.5 R31.2 | length 312.2
  TOP w30: CN2.5 4793.78,3169.78 R31.2
NetD1_1: D1.1 D3.1 | length 152.4
  TOP w20: D1.1 2569.61,3395 2626.82,3395 D3.1@2635.5,3403.68
NetD1_3: D1.3 R38.2 | length 627.9
  TOP w20: R38.2@2040.5,3679.5 2110.5,3679.5 2135,3655 2135,3360 2158.63,3336.37 D1.3
NetD2_1: D2.1 R3.2 | length 2096
  TOP w10: R3.2@3595,2159 R3.2
  TOP w12: D2.1 2225,2480 2225,2135 2285,2075 2560,2075 2640,1995 3555,1995 3595,2035 R3.2@3595,2159
NetD2_3: D2.3 R2.2 | length 2305.2
  TOP w12: D2.3 2510.98,2565.98 2490,2545 2365,2545 2265,2445 2265,2150 2300,2115 2565,2115 2660,2020 3515,2020 3540,2045 3540,2306 R2.2
NetD4_4: D4.4 FL2.2 R27.1 SW1.2 | length 5676.2
  TOP w10: R27.1@3662.5,2667.5 R27.1@3670,2660 ; v1(4630.5,3215) 4656.91,3241.41 D4.4
  TOP w30: SW1.2 2464.5,3534.5 2865,3935 4975,3935 5040.5,3869.5 v1(5040.5,3490) FL2.2 ; R27.1@3670,2660 3790,2660 v1(3880,2570)
  BOTTOM w30: v1(3880,2570) 3880,2610 3905,2635 4590,2635 4630.5,2675.5 v1(4630.5,3215) 4630.5,3450.5 4670,3490 v1(5040.5,3490)
NetD5_4: D5.4 R54.1 | length 285.4
  TOP w10: D5.4 3544.62,3089.62 3600,3145 3600,3275 3631.5,3306.5 R54.1
NetFP2: SCL.1 U1.16 | length 935.3
  TOP w6: SCL.1 3635,3825 3635,3425 3710,3350 3710,3080 3727.35,3062.65 U1.16
NetFP3: SDA.1 U1.17 | length 987.3
  TOP w6: SDA.1 3580.56,3864.44 3615,3830 3615,3420 3695,3340 3695,3065 3717.04,3042.96 U1.17
NetQ1_1: Q1.1 R23.2 | length 410.4
  TOP w10: R23.2@4393,3463 4393,3493 4410,3510 4545,3510 4690.93,3655.93 Q1.1
NetQ1_3: Q1.3 R26.1 | length 199.5
  TOP w10: R26.1 4546,3485 4590,3485 4654.63,3549.63 Q1.3
NetR1_2: R1.2 U5.3 U6.4 | length 1671.5
  TOP w10: R1.2 2923,3660 U5.3 v1(3135,3660) ; U6.4 v1(3160,2815)
  BOTTOM w10: v1(3135,3660) 2900,3660 2870,3630 2870,2860 2915,2815 v1(3160,2815)
NetR2_1: R2.1 U1.11 | length 1347.3
  TOP w10: v1(3560,2490) 3570,2490 3592,2468 3592,2418 R2.1 ; U1.11 v1(3882.29,3280)
  BOTTOM w10: v1(3560,2490) 3580,2510 3580,3295 3610,3325 3860,3325 3877.29,3307.71 v1@3877.29,3285
NetR3_1: R3.1 U1.12 | length 1255.8
  TOP w10: R3.1 v1(3660,2219.5) ; v1(3806.78,3234.6) U1.12
  BOTTOM w10: v1(3660,2219.5) 3695,2254.5 3695,3035 3725,3065 3725,3215 3744.6,3234.6 v1(3806.78,3234.6)
NetR9_2: R9.2 R52.2 X1.3 | length 244.6
  TOP w10: R52.2@3680.5,3505 X1.3@3770,3505 ; X1.3 3770.39,3434.61 3804.5,3400.5 R9.2
NetR11_2: R11.2 U5.6 | length 144.1
  TOP w10: R11.2 2980,3535.5 3005.5,3510 U5.6
NetR12_2: R12.2 U5.8 | length 749.7
  TOP w10: R12.2 2825.5,3214.5 2850.5,3189.5 2954.5,3189.5 2980,3215 2980,3320 3050,3390 3235,3390 3305,3460 U5.8
NetR14_2: R14.2 U5.11 | length 671.9
  TOP w10: R14.2 2914,3265 2925,3265 2955,3295 2955,3375 3000,3420 3185,3420 3215,3450 3215,3540 3285,3610 U5.11
NetR16_1: R16.1 U2.1 | length 150.8
  TOP w10: U2.1 4453.02,2479.02 R16.1
NetR18_1: R18.1 U1.48 | length 198.9
  TOP w10: U1.48 4136.23,3315.22 R18.1@4140,3318.99
NetR19_1: R19.1 U6.6 | length 696.7
  TOP w10: R19.1 2885,2963 2885,2615 2905,2595 2995,2595 3015,2615 3015,2705 3025,2715 U6.6
NetR24_2: R24.2 U6.5 | length 170.1
  TOP w10: R24.2 2977,2765 U6.5
NetR34_2: R34.2 U6.13 | length 146.1
  TOP w10: U6.13 3494,2915 R34.2
NetR37_2: R37.2 SW2.3 | length 121.4
  TOP w10: R37.2 2456.18,2293.82 2522.5,2227.5 SW2.3
NetR43_2: R43.2 U4.3 U5.10 | length 615.5
  TOP w10: R43.2 3195.06,3272.5 3200,3267.56 U4.3 3327.56,3267.56 3335,3275 3335,3370 3405,3440 3405,3545 3390,3560 U5.10
NetR45_1: R45.1 U8.5 U8.10 | length 526.8
  TOP w10: U8.5 U8.10 3410,2195 3430,2215 3430,2293 R45.1
NetR46_2: R46.2 U8.2 U9.1 | length 618.1
  TOP w10: U9.1 2775.59,2295.59 2867.5,2387.5 2867.5,2487.5 2892.5,2512.5 2972.5,2512.5 3000,2485 3000,2365 3020,2345 U8.2
NetR47_1: R47.1 R49.1 R51.1 U9.3 | length 703.9
  TOP w10: R47.1 2774.5,2652.5 R51.1 2816.5,2653.5 2825,2645 R49.1@2825,2421.5 ; U9.3 2699.21,2220.79 2690,2230 2690,2315 2705,2330 2770,2330 2830,2390 R49.1@2830,2422
NetR48_1: R48.1 U8.8 | length 202.6
  TOP w10: U8.8 3415,2095 3435,2115 3435,2165 R48.1
NetR51_2: R51.2 U6.11 | length 888.1
  TOP w10: R51.2 2831.5,2713.5 2855,2690 2855,2595 2895,2555 3095,2555 3195,2655 3195,2780 3230,2815 U6.11
NetR58_1: R58.1 R60.2 SW2.2 | length 643.7
  TOP w10: SW2.2 2432.24,2187.76 2450,2170 2560,2170 2665,2275 R58.1 2695,2400 2720,2425 R60.2
NetR59_1: R59.1 SW2.1 | length 196.1
  TOP w10: SW2.1 2332.24,2377.24 R59.1
NetR61_2: R61.2 U1.35 | length 349.9
  TOP w10: U1.35 4059.45,2800.55 4130,2730 4130,2610 4150,2590 4198,2590 R61.2
NetU5_1: U5.1 U8.3 | length 2467.2
  TOP w10: U5.1 3140,3760 v1@3160,3740 ; U8.3 v1@3160,2295
  BOTTOM w10: v1(3155,2295) 3155,2625 3095,2685 2700,2685 2665,2720 2665,2880 2820,3035 2820,3715 2845,3740 v1(3155,3740)
NetU8_1: U8.1 U8.6 U8.9 | length 681.8
  TOP w10: U8.6 v1(3230,2145) U8.9 ; U8.1 3205,2395 v1(3230.16,2369.84)
  BOTTOM w10: v1(3230,2145) 3230.16,2145.16 v1(3230.16,2369.84)
OE: D5.1 R35.2 U1.4 | length 938.3
  TOP w10: D5.1 3477.91,2977.09 3485,2970 3605,2970 3620,2985 3620,3075 v1(3630,3085) ; v1(3985,3240) 3995,3240 4020.08,3214.92 U1.4
  BOTTOM w10: v1(3630,3085) 3610,3105 3610,3240 3650,3280 3825,3280 3865,3240 v1(3985,3240)
PGM: R60.1 U1.13 | length 2923.1
  TOP w10: v1(2780,2490) R60.1 ; v1(3800,3165) 3800,3127.22 U1.13
  BOTTOM w10: v1(2780,2490) 2800,2470 2800,2050 2810,2040 3775,2040 3795,2060 3795,2690 3825,2720 3950,2720 3960,2730 3960,2830 3950,2840 3875,2840 3800,2915 v1(3800,3165)
POUTEN: R21.1 U1.28 U7.3 | length 3671.6
  TOP w10: U7.3 1910.87,3803.87 R21.1 2089.5,3805.5 v1(2165,3730) ; U1.28 v1(3921.66,2920) v1@3921.66,2923.34
  BOTTOM w10: v1(2165,3730) 2175,3730 2230,3785 4145,3785 4165,3765 4165,3180 4140,3155 3880,3155 3855,3130 3855,2945 3880,2920 v1(3921.66,2920)
POUTFLX: R22.2 U1.18 U7.4 | length 3774.9
  TOP w10: U7.4 1803.5,3703.47 R22.2 1835.5,3805.5 1855,3825 1855,3885 1880,3910 2050,3910 2155,3805 v1(2165,3805) ; U1.18 v1(3933.28,3023.28)
  BOTTOM w10: v1(2165,3805) 2175,3815 4165,3815 4195,3785 4195,3040 4178.28,3023.28 v1(3933.28,3023.28)
RSTMX: R25.2 U1.1 U6.8 | length 2206
  TOP w10: U6.8 3507,2665 R25.2 ; v1(4060,3355) 4090,3325 4090,3240 4079.14,3229.14 U1.1
  BOTTOM w10: v1(3440,2665) 3440,3625 3460,3645 3485,3645 4035,3645 4060,3620 v1(4060,3355)
RSTX: R8.2 U1.3 U5.4 | length 2118.2
  TOP w10: R8.2 2889,3610 U5.4 v1(3190,3610) v1@3200,3610 ; v1(3975,3305) 3995,3305 4039.77,3260.23 U1.3
  BOTTOM w10: v1@3185,3610 3275,3700 4110,3700 4140,3670 4140,3300 4120,3280 4005,3280 3980,3305 v1(3975,3305)
SI: R17.2 U1.29 U6.3 | length 2519
  TOP w10: R17.2 2953.5,2818.5 v1(3000,2865) U6.3 ; v1@3915,2765 3941.34,2791.34 U1.29
  BOTTOM w10: v1(3000,2865) 3335,2865 3395,2805 3395,2130 3430,2095 3730,2095 3760,2125 3760,2730 3790,2760 3908.32,2760 3910,2761.68 v1(3910,2770)
SO: U1.30 U5.13 | length 2499.6
  TOP w10: U5.13 3425,3710 3440,3725 v1(3440,3860.75) ; U1.30 3961.03,2798.97 3990,2770 v1(4030,2770)
  BOTTOM w10: v1(3440,3860.75) 3509.25,3930 4185,3930 4230,3885 4230,2810 4193.35,2773.35 4033.35,2773.35 v1(4030,2770)
SWCLK: J1.2 U1.40 | length 1194.3
  TOP w10: U1.40 4235.78,2964.22 4245,2955 4245,2890 4380,2755 4575,2755 4720,2610 4720,2370 4770,2320 J1.2
SWDIO: J1.3 U1.41 | length 1131.7
  TOP w10: U1.41 4256.09,2983.91 4270,2970 4270,2910 4390,2790 4595,2790 4755,2630 4755,2435 4770,2420 J1.3
UDP0_CONTROL: R20.1 R23.1 U1.47 | length 792.5
  TOP w10: U1.47 4202.02,3102.02 4220,3120 4220,3350 R23.1@4333,3463 ; R23.1 4339.5,3519.5 4365,3545 4506,3545 R20.1
USB_DM: C19.2 R29.1 U1.44 | length 538.7
  TOP w10: U1.44 4262.96,3042.96 4360.5,3140.5 4360.5,3254.5 R29.1@4520.5,3254.5
USB_DP: C20.2 R30.1 U1.45 | length 709.2
  TOP w10: U1.45 4227.65,3062.65 4245,3080 4245,3345 4275,3375 4340,3375 4359.5,3355.5 C20.2 ; C20.2@4350,3335.5 4469.5,3335.5 R30.1@4507.5,3373.5
UVCC: C5.1 C11.1 D3.2 FL1.1 R1.1 R6.1 R15.1 R24.1 R32.2 R39.2 R40.1 R53.1 TP2.1 U6.14 | length 1779.5
  TOP w10: C5.1@2132.5,2187.5 C5.1 C5.1@2138.5,2187.5 ; R40.1@2699,2070 R40.1@2704.5,2064.5
  TOP w20: v1@3265,2965 U6.14
  TOP w25: R39.2 v1(3565.5,3580.5)
  TOP w30: v1(2200,2585) 2245,2585 2256.5,2596.5 R53.1@2256.5,2680 ; R15.1 2291,3255 2616.74,3255 D3.2@2628,3266.26 ; v1(2630,2175) 2630,2104.99 2664.99,2070 R40.1@2699,2070 ; v1(2750,3565) 2779.5,3535.5 R6.1 ; R1.1 v1@2913.5,3860 ; R24.1 2954.5,2650.5 v1(2975,2630) ; C11.1 3232.5,2997.5 v1@3265,2965 ; v1(3735,3740) 3760,3715 R32.2@3860,3715
  TOP w40: TP2.1 C5.1@2132.5,2187.5 ; C5.1@2138.5,2187.5 FL1.1
  other v1: 1985,2187.5 2050,2187.5 3253.88,2976.12 2455,3255 2915,3860
UVCC_ADC: C32.2 R32.1 R57.2 U1.8 | length 693
  TOP w10: C32.2@3925,3865 3925,3280.82 3941.34,3264.47 U1.8
UVCCM: R41.2 U1.2 U4.2 | length 2209
  TOP w10: R41.2 3018.5,3293.5 3040,3315 3160,3315 3181.85,3293.15 U4.2 3273.15,3293.15 v1(3295,3315) ; v1(3975,3370) 4059.45,3285.55 U1.2
  BOTTOM w10: v1(3295,3315) 3345,3315 3365,3335 3365,3645 3395,3675 4085,3675 4115,3645 4115,3325 4095,3305 4040,3305 v1(3975,3370)
WRITE: R58.2 U1.32 | length 2915.5
  TOP w10: v1(2619.5,2555) 2665,2509.5 R58.2 ; v1@4000,2905 4000.4,2904.6 U1.32
  BOTTOM w10: v1(2619.5,2555) 2665,2555 2690,2530 2690,2045 2730,2005 3795,2005 3830,2040 3830,2650 3865,2685 3970,2685 3985,2700 3985,2898.34 v1(4001.66,2915)
pads on no net: CN1.5 CN1.7 CN1.9 CN2.4 D4.5 D5.3 D6.4 SW1.3 SW1.4 SW1.5 SW2.4 SW2.5 U1.5 U1.6 U1.7 U1.9 U1.10 U1.22 U1.23 U1.26 U1.27 U1.31 U1.33 U1.34 U1.39 U3.2 U8.11
copper on no net: | length 14878.1
  POWER w20: 1645,3360 1900,3360 1955,3415 1955,3565 2005,3615 2290,3615 2330,3575 ; 3350,2830 3350,3075 3490,3215 3490,3400 3580,3490 3725,3490 3800,3565 3800,3753.74 3758.74,3795 3515,3795 3340,3620 3340,3300 3095,3055 3095,2865 2925,2695 2925,2315 2900,2290 2315,2290 2255,2350 2255,2695 2325,2765 2520,2765 2680,2925 2680,3135 2980,3435 2980,3890 2950,3920 2865,3920 2835,3890 2835,3675 2430,3675 2330,3575 ; 5120,2080 4855,2080 4760,2175 4760,2425 4725,2460 4360,2460 4305,2405 4305,2120 4235,2050 3570,2050 3505,2115 3505,2665 3585,2745 3585,2810 3540,2855 3380,2855 3325,2800 3325,2315 3100,2090 1875,2090 1845,2120 1845,3210 1885,3250 2110,3250 2330,3470 2330,3575

## Polygon pours and split planes (outlines as drawn)
GND on TOP "Top Layer-No Net" (solid, remove dead copper, pour order 1003): 1910,3315 1915,3320 3350,3320 3350,2670 3320,2640 3315,2635 1925,2635 1925,3300 1910,3315
GND on TOP "Top Layer-No Net" (solid, pour order 1002): 3420,3120 3425,3115 3655,3115 3655,2960 3650,2955 3415,2955 3415,3100 3425,3110
GND on TOP "Top Layer-No Net" (solid, remove dead copper, pour order 1001): 3775,3255 3780,3250 4195,3250 4195,2830 4205,2820 4195,2810 3765,2810 3765,3245 3775,3255
GND on TOP "Top Layer-No Net" (solid, remove dead copper, pour order 1000): 3295,3915 3705,3915 3705,3655 3710,3650 3700,3660 3295,3660 3295,3915
5.0V on POWER "Top Layer-No Net 1" (solid, pour order 1001): 1650,3350 1910,3350 1970,3410 1970,3560 1965,3565 2005,3605 2010,3605 2280,3605 2285,3600 2320,3565 2330,3565 2330,3485 2320,3475 2110,3265 2105,3265 1885,3265 1880,3260 1835,3215 1835,3210 1835,2125 1830,2120 1865,2085 1865,2080 3105,2080 3110,2075 3335,2300 3335,2310 3335,2790 3340,2795 3390,2845 3535,2845 3575,2805 3575,2750 3500,2675 3500,2110 3560,2050 3570,2050 4235,2050 4295,2110 4315,2110 4315,2400 4370,2455 4370,2460 4690,2460 4715,2435 4740,2410 4760,2410 4760,2175 4750,2165 4845,2070 4860,2070 5095,2070 5105,2080 5105,1965 1665,1965 1655,1975 1650,1980 1650,3350
UVCC on POWER "Top Layer-No Net 1" (solid, pour order 1000): 2345,3570 2435,3660 2840,3660 2845,3665 2850,3670 2850,3885 2850,3890 2865,3905 2950,3905 2950,3900 2970,3880 2970,3445 2970,3440 2670,3140 2665,3135 2665,2920 2660,2920 2515,2775 2320,2775 2245,2700 2245,2340 2245,2335 2305,2275 2310,2280 2905,2280 2910,2280 2940,2310 2940,2695 2940,2700 3100,2860 3105,2865 3105,3050 3110,3050 3355,3295 3350,3300 3350,3610 3525,3785 3535,3795 3750,3795 3750,3785 3790,3745 3785,3740 3785,3575 3785,3570 3720,3505 3715,3500 3580,3500 3480,3400 3480,3220 3480,3215 3340,3075 3335,3070 3335,2835 3335,2820 3315,2800 3315,2320 3095,2100 3085,2090 1880,2090 1880,2100 1865,2115 1860,2120 1860,3205 1860,3210 1885,3235 1890,3240 2110,3240 2115,3240 2340,3465 2345,3470 2345,3570
3.3V on POWER "Top Layer-No Net" (solid, pour order 1000): 1675,3960 5090,3960 5090,2110 5120,2080 5110,2090 4860,2090 4775,2175 4775,2420 4775,2425 4730,2470 4355,2470 4355,2465 4300,2410 4295,2405 4295,2125 4295,2120 4225,2050 3570,2050 3570,2060 3515,2115 3520,2120 3520,2660 3520,2665 3595,2740 3595,2810 3545,2860 3540,2865 3385,2865 3370,2865 3360,2855 3365,2860 3365,3065 3365,3075 3500,3210 3500,3395 3505,3395 3585,3475 3590,3480 3725,3480 3735,3480 3815,3560 3815,3755 3810,3755 3765,3800 3760,3795 3515,3795 3505,3795 3330,3620 3340,3610 3340,3305 3335,3305 3090,3060 3085,3055 3085,2875 3085,2870 2915,2700 2915,2315 2910,2315 2895,2300 2325,2300 2270,2355 2265,2360 2265,2685 2270,2685 2330,2745 2340,2755 2520,2755 2530,2755 2690,2915 2695,2920 2695,3135 2990,3430 2995,3435 2995,3890 2960,3925 2955,3920 2865,3920 2855,3920 2825,3890 2825,3690 2430,3690 2425,3685 2335,3595 2335,3590 2330,3590 2295,3625 2000,3625 1945,3570 1940,3565 1940,3420 1895,3375 1890,3370 1655,3370 1655,3940 1675,3960
GND on GND "Top Layer-No Net" (solid, pour order 1000): 1685,3960 1690,3965 5085,3965 5085,3385 5110,3360 5100,3350 4670,3350 4670,2630 4665,2625 4670,2630 5115,2630 5115,1990 5105,1980 5100,1985 1675,1985 1675,3960 1670,3965
FGND on GND "Top Layer-No Net" (solid, pour order 1001): 5110,3300 5105,3305 4725,3305 4725,2690 4720,2685 4725,2680 5105,2680 5105,3295 5110,3300
GND on BOTTOM "Top Layer-No Net" (solid, remove dead copper, pour order 1000): 3325,3950 3330,3945 4270,3945 4270,2745 4265,2740 4230,2775 3340,2775 3340,3935 3325,3950
GND on BOTTOM "Top Layer-No Net" (solid, remove dead copper, pour order 1001): 2765,3155 2770,3150 3425,3150 3425,2640 3420,2635 3405,2620 2785,2620 2785,3125 2765,3145
no net on PLACE_BOUND_TOP (solid): 2550.35,2969.42 ccw(c2427.15,2969.42) 2427.15,3092.62 ccw(c2427.15,2969.42) 2303.95,2969.42 ccw(c2427.15,2969.42) 2427.15,2846.22 ccw(c2427.15,2969.42) 2550.35,2969.42
no net on PLACE_BOUND_TOP (solid): 4583.7,2969.42 ccw(c4460.5,2969.42) 4460.5,3092.62 ccw(c4460.5,2969.42) 4337.3,2969.42 ccw(c4460.5,2969.42) 4460.5,2846.22 ccw(c4460.5,2969.42) 4583.7,2969.42

## Keep-outs
GND:
  lines w40: 4691.5,2654.5 5113.5,2654.5 ; 4691.5,2657.5 4691.5,3330 5118.5,3330
Keep-Out Layer:
  lines w10: 1653.54,2047.24 ccw(c1732.28,2047.24) 1732.28,1968.5 5039.37,1968.5 ccw(c5039.37,2047.24) 5118.11,2047.24 5118.11,3897.63 ccw(c5039.37,3897.63) 5039.37,3976.37 1732.28,3976.37 ccw(c1732.28,3897.63) 1653.54,3897.63 1653.54,2047.24

## Other copper
TOP:
  pour cut-out: 0,0 10,0 10,10 0,10
  pour cut-out: 0,0 10,0 10,10 0,10
  pour cut-out: 0,0 10,0 10,10 0,10
  pour cut-out: 0,0 10,0 10,10 0,10
  pour cut-out: 0,0 10,0 10,10 0,10
  pour cut-out: 0,0 10,0 10,10 0,10
  pour cut-out: 0,0 10,0 10,10 0,10
  pour cut-out: 0,0 10,0 10,10 0,10
  pour cut-out: 0,0 10,0 10,10 0,10
  pour cut-out: 0,0 10,0 10,10 0,10
  pour cut-out: 0,0 10,0 10,10 0,10
  pour cut-out: 0,0 10,0 10,10 0,10
  pour cut-out: 0,0 10,0 10,10 0,10
  pour cut-out: 0,0 10,0 10,10 0,10
  pour cut-out: 0,0 10,0 10,10 0,10
  pour cut-out: 0,0 10,0 10,10 0,10
  pour cut-out: 0,0 10,0 10,10 0,10
  pour cut-out: 0,0 10,0 10,10 0,10
  pour cut-out: 0,0 10,0 10,10 0,10
  pour cut-out: 0,0 10,0 10,10 0,10
  pour cut-out: 0,0 10,0 10,10 0,10
  pour cut-out: 0,0 10,0 10,10 0,10
  pour cut-out: 0,0 10,0 10,10 0,10
  pour cut-out: 0,0 10,0 10,10 0,10
  pour cut-out: 0,0 10,0 10,10 0,10
  pour cut-out: 0,0 10,0 10,10 0,10
  pour cut-out: 0,0 10,0 10,10 0,10
  pour cut-out: 0,0 10,0 10,10 0,10
  pour cut-out: 0,0 10,0 10,10 0,10
  pour cut-out: 0,0 10,0 10,10 0,10
  pour cut-out: 0,0 10,0 10,10 0,10
  pour cut-out: 0,0 10,0 10,10 0,10
  pour cut-out: 0,0 10,0 10,10 0,10
  pour cut-out: 0,0 10,0 10,10 0,10
  pour cut-out: 0,0 10,0 10,10 0,10
  pour cut-out: 0,0 10,0 10,10 0,10
  pour cut-out: 0,0 10,0 10,10 0,10
  pour cut-out: 0,0 10,0 10,10 0,10
  pour cut-out: 0,0 10,0 10,10 0,10
  pour cut-out: 0,0 10,0 10,10 0,10
  pour cut-out: 0,0 10,0 10,10 0,10
  pour cut-out: 0,0 10,0 10,10 0,10
  pour cut-out: 0,0 10,0 10,10 0,10
  pour cut-out: 0,0 10,0 10,10 0,10
  pour cut-out: 0,0 10,0 10,10 0,10
  pour cut-out: 0,0 10,0 10,10 0,10
  pour cut-out: 0,0 10,0 10,10 0,10
  pour cut-out: 0,0 10,0 10,10 0,10
  pour cut-out: 0,0 10,0 10,10 0,10
  pour cut-out: 0,0 10,0 10,10 0,10
  pour cut-out: 0,0 10,0 10,10 0,10
GND:
  pour cut-out: 0,0 10,0 10,10 0,10
  pour cut-out: 0,0 10,0 10,10 0,10
  pour cut-out: 0,0 10,0 10,10 0,10
  pour cut-out: 0,0 10,0 10,10 0,10
  pour cut-out: 0,0 10,0 10,10 0,10
  pour cut-out: 0,0 10,0 10,10 0,10
  pour cut-out: 0,0 10,0 10,10 0,10
  pour cut-out: 0,0 10,0 10,10 0,10
  pour cut-out: 0,0 10,0 10,10 0,10
  pour cut-out: 0,0 10,0 10,10 0,10
  pour cut-out: 0,0 10,0 10,10 0,10
  pour cut-out: 0,0 10,0 10,10 0,10
  pour cut-out: 0,0 10,0 10,10 0,10
  pour cut-out: 0,0 10,0 10,10 0,10
  pour cut-out: 0,0 10,0 10,10 0,10
  pour cut-out: 0,0 10,0 10,10 0,10
  pour cut-out: 0,0 10,0 10,10 0,10
  pour cut-out: 0,0 10,0 10,10 0,10
  pour cut-out: 0,0 10,0 10,10 0,10
  pour cut-out: 0,0 10,0 10,10 0,10
  pour cut-out: 0,0 10,0 10,10 0,10
  pour cut-out: 0,0 10,0 10,10 0,10
  pour cut-out: 0,0 10,0 10,10 0,10
  pour cut-out: 0,0 10,0 10,10 0,10
  pour cut-out: 0,0 10,0 10,10 0,10
  pour cut-out: 0,0 10,0 10,10 0,10
  pour cut-out: 0,0 10,0 10,10 0,10
  pour cut-out: 0,0 10,0 10,10 0,10
  pour cut-out: 0,0 10,0 10,10 0,10
  pour cut-out: 0,0 10,0 10,10 0,10
  pour cut-out: 0,0 10,0 10,10 0,10
  pour cut-out: 0,0 10,0 10,10 0,10
  pour cut-out: 0,0 10,0 10,10 0,10
  pour cut-out: 0,0 10,0 10,10 0,10
  pour cut-out: 0,0 10,0 10,10 0,10
  pour cut-out: 0,0 10,0 10,10 0,10
  pour cut-out: 0,0 10,0 10,10 0,10
  pour cut-out: 0,0 10,0 10,10 0,10
  pour cut-out: 0,0 10,0 10,10 0,10
  pour cut-out: 0,0 10,0 10,10 0,10
  pour cut-out: 0,0 10,0 10,10 0,10
  pour cut-out: 0,0 10,0 10,10 0,10
  pour cut-out: 0,0 10,0 10,10 0,10
  pour cut-out: 0,0 10,0 10,10 0,10
  pour cut-out: 0,0 10,0 10,10 0,10
  pour cut-out: 0,0 10,0 10,10 0,10
  pour cut-out: 0,0 10,0 10,10 0,10
  pour cut-out: 0,0 10,0 10,10 0,10
  pour cut-out: 2580.51,2972.44 2578.68,2995.63 2573.25,3018.26 2564.35,3039.75 2552.19,3059.59 2537.08,3077.28 2519.39,3092.39 2499.55,3104.55 2478.06,3113.45 2455.43,3118.88 2432.24,3120.71 2409.05,3118.88 2386.42,3113.45 2364.93,3104.55 2345.09,3092.39 2327.4,3077.28 2312.29,3059.59 2300.13,3039.75 2291.23,3018.26 2285.8,2995.63 2283.97,2972.44 2285.8,2949.25 2291.23,2926.62 2300.13,2905.13 2312.29,2885.29 2327.4,2867.6 2345.09,2852.49 2364.93,2840.33 2386.42,2831.43 2409.05,2826 2432.24,2824.17 2455.43,2826 2478.06,2831.43 2499.55,2840.33 2519.39,2852.49 2537.08,2867.6 2552.19,2885.29 2564.35,2905.13 2573.25,2926.62 2578.68,2949.25 2580.51,2972.44
  pour cut-out: 4613.86,2972.44 4612.03,2995.63 4606.6,3018.26 4597.7,3039.75 4585.54,3059.59 4570.43,3077.28 4552.74,3092.39 4532.9,3104.55 4511.41,3113.45 4488.78,3118.88 4465.59,3120.71 4442.4,3118.88 4419.77,3113.45 4398.28,3104.55 4378.44,3092.39 4360.75,3077.28 4345.64,3059.59 4333.48,3039.75 4324.58,3018.26 4319.15,2995.63 4317.32,2972.44 4319.15,2949.25 4324.58,2926.62 4333.48,2905.13 4345.64,2885.29 4360.75,2867.6 4378.44,2852.49 4398.28,2840.33 4419.77,2831.43 4442.4,2826 4465.59,2824.17 4488.78,2826 4511.41,2831.43 4532.9,2840.33 4552.74,2852.49 4570.43,2867.6 4585.54,2885.29 4597.7,2905.13 4606.6,2926.62 4612.03,2949.25 4613.86,2972.44
  pour cut-out: 0,0 10,0 10,10 0,10
  pour cut-out: 0,0 10,0 10,10 0,10
  pour cut-out: 0,0 10,0 10,10 0,10
  pour cut-out: 0,0 10,0 10,10 0,10
  pour cut-out: 0,0 10,0 10,10 0,10
  pour cut-out: 0,0 10,0 10,10 0,10
  pour cut-out: 0,0 10,0 10,10 0,10
  pour cut-out: 0,0 10,0 10,10 0,10
  pour cut-out: 0,0 10,0 10,10 0,10
  pour cut-out: 0,0 10,0 10,10 0,10
  pour cut-out: 0,0 10,0 10,10 0,10
  pour cut-out: 0,0 10,0 10,10 0,10
  pour cut-out: 0,0 10,0 10,10 0,10
  pour cut-out: 0,0 10,0 10,10 0,10
  pour cut-out: 0,0 10,0 10,10 0,10
  pour cut-out: 0,0 10,0 10,10 0,10
  pour cut-out: 0,0 10,0 10,10 0,10
  pour cut-out: 0,0 10,0 10,10 0,10
BOTTOM:
  pour cut-out: 0,0 10,0 10,10 0,10
  pour cut-out: 0,0 10,0 10,10 0,10
  pour cut-out: 0,0 10,0 10,10 0,10
  pour cut-out: 0,0 10,0 10,10 0,10
  pour cut-out: 0,0 10,0 10,10 0,10
  pour cut-out: 0,0 10,0 10,10 0,10
  pour cut-out: 0,0 10,0 10,10 0,10
  pour cut-out: 0,0 10,0 10,10 0,10
  pour cut-out: 0,0 10,0 10,10 0,10
  pour cut-out: 0,0 10,0 10,10 0,10
  pour cut-out: 0,0 10,0 10,10 0,10
  pour cut-out: 0,0 10,0 10,10 0,10
  pour cut-out: 0,0 10,0 10,10 0,10
  pour cut-out: 0,0 10,0 10,10 0,10
  pour cut-out: 0,0 10,0 10,10 0,10
  pour cut-out: 0,0 10,0 10,10 0,10
  pour cut-out: 0,0 10,0 10,10 0,10
  pour cut-out: 0,0 10,0 10,10 0,10
  pour cut-out: 0,0 10,0 10,10 0,10
  pour cut-out: 0,0 10,0 10,10 0,10
  pour cut-out: 0,0 10,0 10,10 0,10
  pour cut-out: 0,0 10,0 10,10 0,10
  pour cut-out: 0,0 10,0 10,10 0,10
  pour cut-out: 0,0 10,0 10,10 0,10
  pour cut-out: 0,0 10,0 10,10 0,10
  pour cut-out: 0,0 10,0 10,10 0,10
  pour cut-out: 0,0 10,0 10,10 0,10
  pour cut-out: 0,0 10,0 10,10 0,10
  pour cut-out: 0,0 10,0 10,10 0,10
  pour cut-out: 0,0 10,0 10,10 0,10
  pour cut-out: 0,0 10,0 10,10 0,10
  pour cut-out: 0,0 10,0 10,10 0,10
  pour cut-out: 0,0 10,0 10,10 0,10
  pour cut-out: 0,0 10,0 10,10 0,10
  pour cut-out: 0,0 10,0 10,10 0,10
  pour cut-out: 0,0 10,0 10,10 0,10
  pour cut-out: 0,0 10,0 10,10 0,10
  pour cut-out: 0,0 10,0 10,10 0,10
  pour cut-out: 0,0 10,0 10,10 0,10
  pour cut-out: 0,0 10,0 10,10 0,10
  pour cut-out: 0,0 10,0 10,10 0,10
  pour cut-out: 0,0 10,0 10,10 0,10
  pour cut-out: 0,0 10,0 10,10 0,10
  pour cut-out: 0,0 10,0 10,10 0,10
  pour cut-out: 0,0 10,0 10,10 0,10
  pour cut-out: 0,0 10,0 10,10 0,10
  pour cut-out: 0,0 10,0 10,10 0,10
  pour cut-out: 0,0 10,0 10,10 0,10
  pour cut-out: 0,0 10,0 10,10 0,10
  pour cut-out: 0,0 10,0 10,10 0,10
  pour cut-out: 0,0 10,0 10,10 0,10
  pour cut-out: 0,0 10,0 10,10 0,10
  pour cut-out: 0,0 10,0 10,10 0,10
  pour cut-out: 0,0 10,0 10,10 0,10
  pour cut-out: 0,0 10,0 10,10 0,10
  pour cut-out: 0,0 10,0 10,10 0,10
  pour cut-out: 0,0 10,0 10,10 0,10
  pour cut-out: 0,0 10,0 10,10 0,10
  pour cut-out: 0,0 10,0 10,10 0,10
  pour cut-out: 0,0 10,0 10,10 0,10
  pour cut-out: 0,0 10,0 10,10 0,10
  pour cut-out: 0,0 10,0 10,10 0,10
  pour cut-out: 0,0 10,0 10,10 0,10
  pour cut-out: 0,0 10,0 10,10 0,10

## Silkscreen, mask and mechanical layers (free items; w line width, h text height)
Top Overlay:
  text "GND" at 4966.5,3736.5 h30
  text "3.3V" at 4964.5,3586.5 h30
  text "G" at 2290.5,3426.5 h30
  text "R" at 2547.5,3424.5 h30
  text "9" at 1885.5,3409.5 h30
  text "10" at 1802.5,3408.5 h30
  text "R30" at 4385.5,3379.5 h30
  text "R" at 2330.5,2764.5 h30
  text "G" at 2504.5,2764.5 h30
  text "1" at 1904.5,2501.5 h30
  text "2" at 1818.5,2499.5 h30
  text "+" at 3630,2395 h175
  text "DIO" at 5060,2375 h35 r90
  text "CLK" at 5060,2250 h35 r90
  text "UVCC" at 1727.5,2179.5 h30
  text "GND" at 1745,2035 h30
  text "MB2146-07-E V0.9" at 3831.5,2011.5 h31
  text "5V" at 4572.5,2009.5 h30
  text "GND" at 4415.5,2008.5 h30
CONSTRUCTION:
  lines w1: 5106.78,3239.5 5107.5,3238.79 5106.78,3239.5
DRAWING_ORIGIN:
  lines w1: 1943.5,1968.5 1993.5,1968.5 ; 1968.5,1943.5 1968.5,1993.5
PIN_NUMBER:
  text "1" at 2407.04,2972.44 h31.5
  text "1" at 4440.39,2972.44 h31.5